# Altium PCB soldering.PcbDoc
Units mm, origin at the board's own origin, x right, y up, seen from the top; angles counter-clockwise.
Board outline 85 x 34.5 mm, 2 copper layers (Top Layer, Bottom Layer), stack 1.571 mm thick; 52 components, 48 nets, 169 pads, 3 vias.
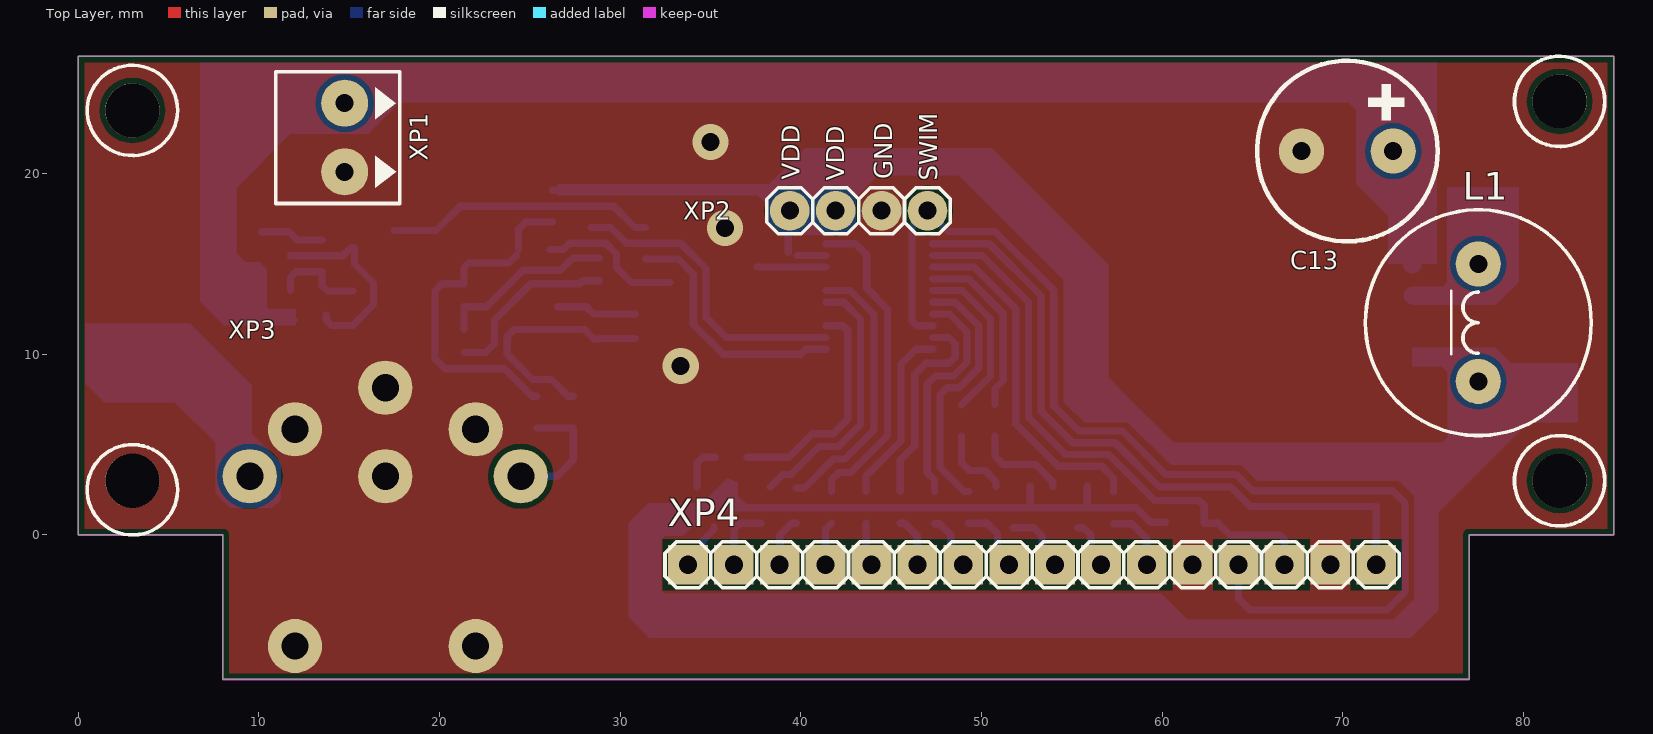
[diagram p0: Top Layer view]
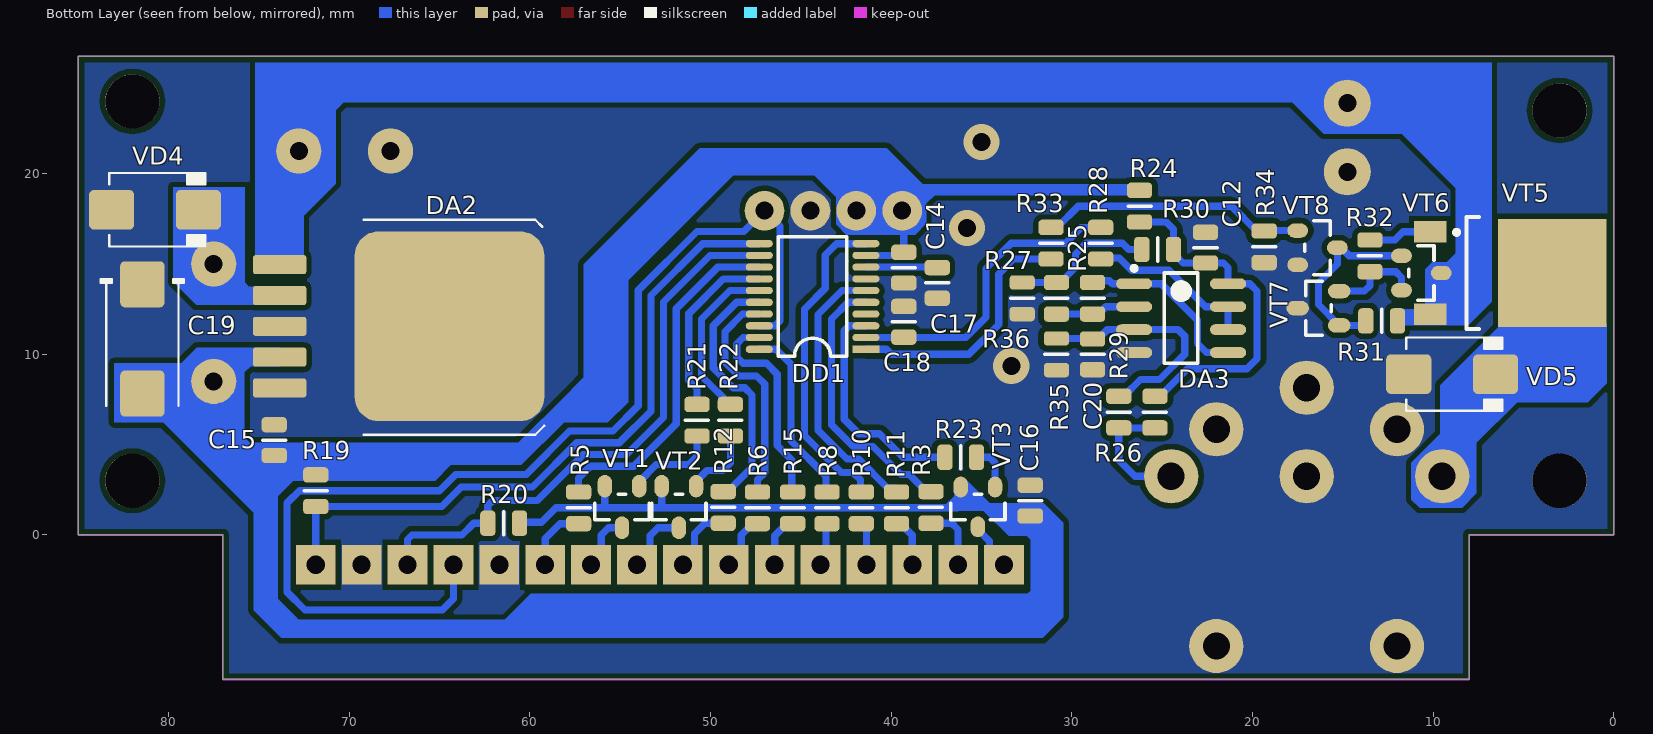
[diagram p1: Bottom Layer view, seen from below]

## Layer stack, top to bottom
Top Solder: solder mask 0.0102, Solder Resist, Dk 3.5
Top Layer: signal copper 0.0356
Dielectric1: core 1.5, FR-4, Dk 4.8
Bottom Layer: signal copper 0.0356
Bottom Solder: solder mask 0.0102, Solder Resist, Dk 3.5

## Board outline
0,0 0,26.5 85,26.5 85,0 77,0 77,-8 8,-8 8,0

## Design rules (kind name [scope] priority, off if disabled: settings)
Clearance Clearance_3 [IsRegion] p1: gap=0.3 ignorepadtopadclearanceinfootprint=FALSE except(0: Arc-Hole Track-Hole SMDPad-Hole THPad-Hole Via-Hole Fill-Hole Poly-Hole Region-Hole Text-Hole)
Clearance [All] p2: gap=0.2 ignorepadtopadclearanceinfootprint=FALSE except(0: Arc-Hole Track-Hole SMDPad-Hole THPad-Hole Via-Hole Fill-Hole Poly-Hole Region-Hole Text-Hole; 0.25: Arc-Arc Arc-Track Track-Track)
Clearance Clearance_2 [IsPad vs IsPad] p3: gap=0.2 ignorepadtopadclearanceinfootprint=FALSE except(0: Arc-Hole Track-Hole SMDPad-Hole THPad-Hole Via-Hole Fill-Hole Poly-Hole Region-Hole Text-Hole)
Clearance Clearance_1 [IsTrack vs IsTrack] p4: gap=0.2 ignorepadtopadclearanceinfootprint=FALSE except(0: Arc-Hole Track-Hole SMDPad-Hole THPad-Hole Via-Hole Fill-Hole Poly-Hole Region-Hole Text-Hole)
ComponentClearance [All] p1: gap=0.2 collisioncheckmode=3 verticalgap=0.2 showdistances=FALSE
HoleSize [All] p1: absolutevalues=TRUE maxlimit=40 minlimit=0.025 maxpercent=80.000 minpercent=20.000
MinimumSolderMaskSliver [All] p1: minsoldermaskwidth=0.15
PolygonConnect [All] p1: connectstyle=Direct reliefconductorwidth=0.254 reliefentries=4 polygonreliefangle="90 Angle" airgapwidth=0.254
RoutingVias [All] p1: holewidth=0.5 width=1.5 viastyle="Through Hole" minholewidth=0.2 minwidth=1 maxholewidth=2 maxwidth=3
SilkToSilkClearance [All] p1: silktosilkclearance=0.15
SilkToSolderMaskClearance SilkscreenOverComponentPads [IsPad] p1: minsilkscreentomaskgap=0.15 clearancetoexposedcopper=TRUE
SolderMaskExpansion [All] p1: expansion=0.102
Width [All] p1: maxlimit=3 minlimit=0.2 preferedwidth=1
25 further rules are at their usual default settings.

## Components (designator, comment, footprint, x,y, rotation, side; value= is the part's Value field where it differs from the comment)
C12 "10uF" CAP0805R 22.6,15.9 r90 bottom
C13 "470uF" CAP_EL_10_19_VERT 70.25,21.25 r0 top
C14 "10uF" CAP0805R 39.3,14.8 r90 bottom
C15 "10uF" CAP0805R 74.15,5.25 r270 bottom
C16 "10uF" CAP0805R 32.3,1.9 r270 bottom
C17 "10uF" CAP0805R 37.45,13.95 r90 bottom
C18 "100nF" CAP0805R 39.3,11.8 r270 bottom
C19 "330uF" TAN_D 81.45,10.85 r270 bottom
C20 "100nF" CAP0805R 28.85,10 r90 bottom
DA2 "LM2575S-5.0" TO-263-5 67.7,11.55 r180 bottom
DA3 "OP Amp" SOP8 23.95,12 r180 bottom
DD1 "8 Bit MCU" TSSOP20 44.35,13.2 r0 bottom
L1 "220 uH" SL1016 77.5,11.75 r270 top
R3 "22" RES0805R#1 37.8,1.525 r270 bottom
R5 "22" RES0805R#1 57.3,1.5 r90 bottom
R6 "22" RES0805R#1 47.4,1.5 r270 bottom
R8 "22" RES0805R#1 43.55,1.5 r90 bottom
R10 "22" RES0805R#1 41.65,1.5 r90 bottom
R11 "22" RES0805R#1 39.7,1.5 r270 bottom
R12 "22" RES0805R#1 49.3,1.525 r90 bottom
R15 "22" RES0805R#1 45.45,1.5 r270 bottom
R19 "10k" RES0805R#1 71.85,2.45 r90 bottom
R20 "10k" RES0805R#1 61.45,0.65 r180 bottom
R21 "22" RES0805R#1 50.75,6.35 r270 bottom
R22 "22" RES0805R#1 48.9,6.35 r270 bottom
R23 "22" RES0805R#1 36.15,4.3 r180 bottom
R24 "10" RES0805R#1 26.25,18.2 r270 bottom
R25 "33k" RES0805R#1 28.85,13.1 r90 bottom
R26 "1k" RES0805R#1 25.4,6.8 r90 bottom
R27 "10k" RES0805R#1 30.85,13.1 r270 bottom
R28 "6k8" RES0805R#1 28.4,16.15 r90 bottom
R29 "10k" RES0805R#1 27.4,6.8 r90 bottom
R30 "1k" RES0805R#1 25.25,15.8 r0 bottom
R31 "10k" RES0805R#1 12.85,11.85 r180 bottom
R32 "100" RES0805R#1 13.5,15.45 r90 bottom
R33 "51" RES0805R#1 31.15,16.15 r270 bottom
R34 "100k" RES0805R#1 19.35,15.95 r90 bottom
R35 "100k" RES0805R#2 30.85,10 r90 bottom
R36 "51" RES0805R#2 32.75,13.1 r90 bottom
VD4 "10BQ100" DO-214AA 80.75,18 r180 bottom
VD5 "10BQ100" DO-214AA 8.95,8.9 r180 bottom
VT1 "IRLML6402" SOT23#1 54.9,1.55 r0 bottom
VT2 "IRLML6402" SOT23#1 51.75,1.55 r0 bottom
VT3 "IRLML6402" SOT23#2 35.2,1.55 r270 bottom
VT5 "STD10PF06T4" DPAK 5.95,14.5 r180 bottom
VT6 "BC847C" SOT23#2 10.65,14.5 r180 bottom
VT7 "BC857B" SOT23#1 16.35,12.55 r90 bottom
VT8 "BC847C" SOT23#2 16.4,15.9 r180 bottom
XP1 "340-021-12" 340-021-12 14.75,22 r90 top
XP2 "PLS" PLS-04 43.2,17.95 r180 top
XP3 "KDJ01-6" KDJ01-6 17,-9.15 r180 top
XP4 "PLS" PLS-16 33.75,-1.65 r0 top

## Footprints (in the part's own frame and the unit in brackets; to place one, negate y for a bottom-side part, rotate by r counter-clockwise, add the part's x,y. Pads: shape width x height; smd on the part's side, far side on the other; paste and mask are expansions set on the pad)
340-021-12 [mm]
  round 2.6 hole 1: 1(1.905,0) 2(-1.905,0)
  silkscreen extent -3.65,-3.05 3.65,3.81, body extent -3.55,-3.1 3.55,3.9, height 8.51
CAP0805R [mm] "capacitor 0805 reflow soldering"
  rrect50% 0.85x1.4 smd: 1(-0.85,0) 2(0.85,0)
  silkscreen extent 0,-0.63 0,0.64, body extent -1,-0.62 1,0.63, height 0.61
CAP_EL_10_19_VERT [mm]
  round 2.5 hole 1: 1(-2.54,0) 2(2.54,0)
  silkscreen extent -5,-5 5,5, body extent -5.08,-5.07 5.08,5.07, height 20.33
DO-214AA [mm] "JEDEC DO214 variation AA. SMB"
  round 0.508 on Mech15: 0(0,0)
  rrect25% 2.5x2.2 smd: A(-2.4,0) K(2.4,0)
  silkscreen extent -2.54,-2.03 2.79,2.03, body extent -2.8,-1.97 2.8,1.98, height 2.62
DPAK [mm] "D-PAK, 4-Leads, Body 6.1x6mm, Pitch 2.28mm, Lead Span 9.7mm, IPC High Density"
  rect 1.8x1.2 smd: 1(-4.2,2.28) 2(-4.2,-2.28)
  rect 6x6 smd: 3(2.54,0)
  silkscreen extent -2.88,-3.1 -1.5,3.1, body extent -4.55,-3.28 5.15,3.3, height 2.32
KDJ01-6 [mm]
  round 3 hole 1.5: 1(-7.5,-12.4) 2(-5,-15) 3(0,-17.3) 4(5,-15) 5(7.5,-12.4) 6(0,-12.4) 7(-5,-3) 8(5,-3)
  body extent -10.5,-19.5 10.5,0, height 19.51
PLS-04 [mm]
  round 2.2 hole 1: 1(-3.81,0) 2(-1.27,0) 3(1.27,0) 4(3.81,0)
  silkscreen extent -5.08,-1.27 5.08,1.27, body extent -5.08,-1.27 5.08,1.27, height 8.45
PLS-16 [mm]
  rect 2.2x2.2 hole 1: 1(0,0) 2(2.54,0) 3(5.08,0) 4(7.62,0) 5(10.16,0) 6(12.7,0) 7(15.24,0) 8(17.78,0) 9(20.32,0) 10(22.86,0) 11(25.4,0) 12(27.94,0) 13(30.48,0) 14(33.02,0) 15(35.56,0) 16(38.1,0)
  silkscreen extent -1.27,-1.27 39.37,1.27, body extent -1.27,-1.27 39.37,1.27, height 8.45
RES0805R#1 [mm] "resistor 0805 reflow soldering"
  rrect50% 0.85x1.4 smd: 1(-0.875,0) 2(0.875,0)
  silkscreen extent 0,-0.64 0,0.64, body extent -1,-0.62 1,0.63, height 0.61
RES0805R#2 [mm] "resistor 0805 reflow soldering"
  rrect50% 0.8x1.4 smd: 1(-0.875,0) 2(0.875,0)
  silkscreen extent 0,-0.64 0,0.64, body extent -1,-0.62 1,0.63, height 0.61
SL1016 [mm]
  round 2.5 hole 1: 1(-3.25,0) 2(3.25,0)
  silkscreen extent -6.25,-6.25 6.25,6.25, body extent -6.5,-6.5 6.5,6.5, height 20
SOP8 [mm] "SOP, 8-Leads"
  oval 2x0.6 smd mask+0.1: 1(-2.6,1.905) 2(-2.6,0.635) 3(-2.6,-0.635) 4(-2.6,-1.905) 5(2.6,-1.905) 6(2.6,-0.635) 7(2.6,0.635) 8(2.6,1.905)
  silkscreen extent -2.73,-2.5 0.92,2.88, body extent -2.9,-2.4 2.9,2.4, height 1.77
SOT23#1 [mm]
  oval 0.8x1.25 smd mask+0.1: 1(-0.95,-1.15) 2(0.95,-1.15) 3(0,1.15)
  silkscreen extent -1.5,-0.7 1.5,0.7, body extent -1.46,-1.16 1.46,1.18, height 1
SOT23#2 [mm]
  oval 1.15x0.8 smd mask+0.1: 1(-1.1,0.95) 2(-1.1,-0.95) 3(1.1,0)
  silkscreen extent -0.7,-1.5 0.7,1.5, body extent -1.16,-1.46 1.18,1.46, height 1
TAN_D [mm] "Molded body capacitor, Body 7.3x4.3mm, 2917, IPC Nominal settings"
  round 1 on Mech15: 0(0,0)
  rrect20% 2.55x2.45 smd: 1(-3.025,0) 2(3.025,0)
  silkscreen extent -3.3,-2.3 3.7,2.3, body extent -3.8,-1.97 3.8,1.98, height 3.1
TO-263-5 [mm] "D-PAK/TO-263-5; 5 Leads; Body 14.4 (inc. leads) x 10.4 mm (LxW max)"
  round 0.5 on Mech15: 0(0,0)
  rrect25% 2.95x1.05 smd: 1(-6.15,3.41) 2(-6.15,1.705) 3(-6.15,0) 4(-6.15,-1.705) 5(-6.15,-3.41)
  rrect25% 10.5x10.5 smd: 6(3.25,0)
  silkscreen extent -1.5,-6 8.5,5.9, body extent -6.73,-5.08 7.29,5.08, height 4.56
TSSOP20 [mm] "TSOP, 20-Leads, Body 6,6x4,5mm (max), Pitch 0,65mm, IPC Medium Density"
  rect 1.5x0.4 smd mask+0.05: 1(-2.95,2.925)
  oval 1.5x0.4 smd mask+0.05: 2(-2.95,2.275) 3(-2.95,1.625) 4(-2.95,0.975) 5(-2.95,0.325) 6(-2.95,-0.325) 7(-2.95,-0.975) 8(-2.95,-1.625) 9(-2.95,-2.275) 10(-2.95,-2.925) 11(2.95,-2.925) 12(2.95,-2.275) 13(2.95,-1.625) 14(2.95,-0.975) 15(2.95,-0.325) 16(2.95,0.325) 17(2.95,0.975) 18(2.95,1.625) 19(2.95,2.275) 20(2.95,2.925)
  silkscreen extent -1.9,-3.3 1.9,3.3, body extent -3.27,-3.3 3.28,3.3, height 1.11

## Part data
C12 C14 C15 C16 C17: library part CC0805_10UF_10V_10%_X7R, "SMD 0805 Capacitor", Case=0805, Manufacturer=GENERIC, Manufacturer1 ComponentHeight=1.35mm, Manufacturer1 Example=MURATA, Manufacturer1 Part Number=GRM21BR71A106KE51L, Tolerance=±10%, Voltage=10V, Author="I. Kuznetsov", Component Type=Standard, CreateDate=30.04.2012, HelpURL=\\cern.ch\dfs\Applications\Altium\Datasheets\CC0805_X7R_MURATA.pdf, LatestRevisionDate=30.04.2012, Manufacturer Part Number=CC0805_10UF_10V_10%_X7R, Mounted=Yes, Part Description="SMD Multilayer Chip Ceramic Capacitor", Part Number=CC0805_10UF_10V_10%_X7R, Pin Count=2, SMD=Yes, Socket=No, Status=Preferred, Table="Capacitors SMD", TC=X7R
C13: library part "SH050M0470B5S-1019 (VERT MOUNTED)", Voltage=50V, Part Number="SH050M0470B5S-1019 (VERT MOUNTED)", Table="Electrolytic THD"
C18 C20: library part CC0805_100NF_50V_10%_X7R, "SMD 0805 Capacitor", Case=0805, Manufacturer=GENERIC, Manufacturer1 ComponentHeight=1.35mm, Manufacturer1 Example=EPCOS, Manufacturer1 Part Number=B37941K5104K62, Tolerance=±10%, Voltage=50V, Author="I. Kuznetsov", Component Type=Standard, CreateDate=03.12.2007, HelpURL=\\cern.ch\dfs\Applications\Altium\Datasheets\CC0805_X7R_EPCOS.pdf, LatestRevisionDate=03.12.2007, Manufacturer Part Number=CC0805_100NF_50V_10%_X7R, Mounted=Yes, Part Description="SMD Multilayer Chip Ceramic Capacitor", Part Number=CC0805_100NF_50V_10%_X7R, Pin Count=2, SMD=Yes, Socket=No, Status=Preferred, Table="Capacitors SMD", TC=X7R
C19: library part T495D337M010AHE100, Voltage=10V, Part Number=T495D337M010AHE100, Table=Tantalum
DA2: Case=TO-263-5, Manufacturer=TI, Author="I. Kuznetsov", Component Type=Standard, Device=LM2575S-5.0, Manufacturer Part Number=LM2575S-5.0, Mounted=Yes, Part Number=LM2575S-5.0, Pin Count=6, SMD=Yes, Socket=No, Status=Active, Table=Regulators
DA3: library part LM358AM, PartNumber=LM358AM
DD1: library part STM8S003F3P6, "8 Bit MCU (STmicroelectronics)", PartNumber=STM8S003F3P6
L1: library part SL1016T-4R7K-B-N, Tolerance="± 10%", Part Number=SL1016T-4R7K-B-N, Table="Inductors THD"
R3 R5 R6 R8 R10 R11 R12 R15 R21 R22 R23: library part R0805_22R_1%_0.125W_100PPM, Case=0805, Manufacturer=GENERIC, Manufacturer1 ComponentHeight=0.6mm, Manufacturer1 Example="NIC COMPONENT", Manufacturer1 Part Number=NRC10F22R0TRF, Power=0.125W, Tolerance=±1%, Author="CERN DEM JLC", Component Type=Standard, CreateDate=03.12.2007, HelpURL=\\cern.ch\dfs\Applications\Altium\Datasheets\R0805_NIC_NRC.pdf, LatestRevisionDate=13.03.2008, Manufacturer Part Number=R0805_22R_1%_0.125W_100PPM, Mounted=Yes, Part Description="General Purpose Thick Film Chip Resistor", Part Number=R0805_22R_1%_0.125W_100PPM, Pin Count=2, SMD=Yes, Socket=No, Status=Preferred, Table="Resistors SMD", TC=±100ppm/°C
R19 R20 R27 R29 R31: library part R0805_10K_1%_0.125W_100PPM, Case=0805, Manufacturer=GENERIC, Manufacturer1 ComponentHeight=0.6mm, Manufacturer1 Example="NIC COMPONENT", Manufacturer1 Part Number=NRC10F1002TRF, Power=0.125W, Tolerance=±1%, Author="CERN DEM JLC", Component Type=Standard, HelpURL=\\cern.ch\dfs\Applications\Altium\Datasheets\R0805_NIC_NRC.pdf, Manufacturer Part Number=R0805_10K_1%_0.125W_100PPM, Mounted=Yes, Part Description="General Purpose Thick Film Chip Resistor", Part Number=R0805_10K_1%_0.125W_100PPM, Pin Count=2, SMD=Yes, Socket=No, Status=Preferred, Table="Resistors SMD", TC=±100ppm/°C
  R19 R20 R31: CreateDate=03.12.2007, LatestRevisionDate=13.03.2008
  R27 R29: CreateDate=12/3/2007, LatestRevisionDate=3/13/2008, PackageDescription=Standard
R24: library part R0805_10R_1%_0.125W_200PPM, Case=0805, Manufacturer=GENERIC, Manufacturer1 ComponentHeight=0.6mm, Manufacturer1 Example="NIC COMPONENT", Manufacturer1 Part Number=NRC10F10R0TRF, Power=0.125W, Tolerance=±1%, Author="CERN DEM JLC", Component Type=Standard, CreateDate=03.12.2007, HelpURL=\\cern.ch\dfs\Applications\Altium\Datasheets\R0805_NIC_NRC.pdf, LatestRevisionDate=24.06.2009, Manufacturer Part Number=R0805_10R_1%_0.125W_200PPM, Mounted=Yes, Part Description="General Purpose Thick Film Chip Resistor", Part Number=R0805_10R_1%_0.125W_200PPM, Pin Count=2, SMD=Yes, Socket=No, Status=Preferred, Table="Resistors SMD", TC=±200ppm/°C
R25: library part R0805_33K_1%_0.125W_100PPM, Case=0805, Manufacturer=GENERIC, Manufacturer1 ComponentHeight=0.6mm, Manufacturer1 Example="NIC COMPONENT", Manufacturer1 Part Number=NRC10F3302TRF, Power=0.125W, Tolerance=±1%, Author="CERN DEM JLC", Component Type=Standard, CreateDate=12/3/2007, HelpURL=\\cern.ch\dfs\Applications\Altium\Datasheets\R0805_NIC_NRC.pdf, LatestRevisionDate=3/13/2008, Manufacturer Part Number=R0805_33K_1%_0.125W_100PPM, Mounted=Yes, PackageDescription=Standard, Part Description="General Purpose Thick Film Chip Resistor", Part Number=R0805_33K_1%_0.125W_100PPM, Pin Count=2, SMD=Yes, Socket=No, Status=Preferred, Table="Resistors SMD", TC=±100ppm/°C
R26 R30: library part R0805_1K_1%_0.125W_100PPM, Case=0805, Manufacturer=GENERIC, Manufacturer1 ComponentHeight=0.6mm, Manufacturer1 Example="NIC COMPONENT", Manufacturer1 Part Number=NRC10F1001TRF, Power=0.125W, Tolerance=±1%, Author="CERN DEM JLC", Component Type=Standard, HelpURL=\\cern.ch\dfs\Applications\Altium\Datasheets\R0805_NIC_NRC.pdf, Manufacturer Part Number=R0805_1K_1%_0.125W_100PPM, Mounted=Yes, Part Description="General Purpose Thick Film Chip Resistor", Part Number=R0805_1K_1%_0.125W_100PPM, Pin Count=2, SMD=Yes, Socket=No, Status=Preferred, Table="Resistors SMD", TC=±100ppm/°C
  R26: CreateDate=12/3/2007, LatestRevisionDate=3/13/2008, PackageDescription=Standard
  R30: CreateDate=03.12.2007, LatestRevisionDate=13.03.2008
R28: library part R0805_6K8_1%_0.125W_100PPM, Case=0805, Manufacturer=GENERIC, Manufacturer1 ComponentHeight=0.6mm, Manufacturer1 Example="NIC COMPONENT", Manufacturer1 Part Number=NRC10F6801TRF, Power=0.125W, Tolerance=±1%, Author="CERN DEM JLC", Component Type=Standard, CreateDate=03.12.2007, HelpURL=\\cern.ch\dfs\Applications\Altium\Datasheets\R0805_NIC_NRC.pdf, LatestRevisionDate=13.03.2008, Manufacturer Part Number=R0805_6K8_1%_0.125W_100PPM, Mounted=Yes, Part Description="General Purpose Thick Film Chip Resistor", Part Number=R0805_6K8_1%_0.125W_100PPM, Pin Count=2, SMD=Yes, Socket=No, Status=Preferred, Table="Resistors SMD", TC=±100ppm/°C
R32: library part R0805_100R_1%_0.125W_100PPM, Case=0805, Manufacturer=GENERIC, Manufacturer1 ComponentHeight=0.6mm, Manufacturer1 Example="NIC COMPONENT", Manufacturer1 Part Number=NRC10F4700TRF, Power=0.125W, Tolerance=±1%, Author="CERN DEM JLC", Component Type=Standard, CreateDate=03.12.2007, HelpURL=\\cern.ch\dfs\Applications\Altium\Datasheets\R0805_NIC_NRC.pdf, LatestRevisionDate=13.03.2008, Manufacturer Part Number=R0805_100R_1%_0.125W_100PPM, Mounted=Yes, Part Description="General Purpose Thick Film Chip Resistor", Part Number=R0805_100R_1%_0.125W_100PPM, Pin Count=2, SMD=Yes, Socket=No, Status=Preferred, Table="Resistors SMD", TC=±100ppm/°C
R33 R36: library part R0805_51R_1%_0.125W_100PPM, Case=0805, Manufacturer=GENERIC, Manufacturer1 ComponentHeight=0.6mm, Manufacturer1 Example="NIC COMPONENT", Manufacturer1 Part Number=NRC10F51R0TRF, Power=0.125W, Tolerance=±1%, Author="CERN DEM JLC", Component Type=Standard, HelpURL=\\cern.ch\dfs\Applications\Altium\Datasheets\R0805_NIC_NRC.pdf, Manufacturer Part Number=R0805_51R_1%_0.125W_100PPM, Mounted=Yes, Part Description="General Purpose Thick Film Chip Resistor", Part Number=R0805_51R_1%_0.125W_100PPM, Pin Count=2, SMD=Yes, Socket=No, Status=Preferred, Table="Resistors SMD", TC=±100ppm/°C
  R33: CreateDate=03.12.2007, LatestRevisionDate=13.03.2008
  R36: CreateDate=12/3/2007, LatestRevisionDate=3/13/2008, PackageDescription=Standard
R34 R35: library part R0805_100K_1%_0.125W_100PPM, Case=0805, Manufacturer=GENERIC, Manufacturer1 ComponentHeight=0.6mm, Manufacturer1 Example="NIC COMPONENT", Manufacturer1 Part Number=NRC10F1003TRF, Power=0.125W, Tolerance=±1%, Author="CERN DEM JLC", Component Type=Standard, HelpURL=\\cern.ch\dfs\Applications\Altium\Datasheets\R0805_NIC_NRC.pdf, Manufacturer Part Number=R0805_100K_1%_0.125W_100PPM, Mounted=Yes, Part Description="General Purpose Thick Film Chip Resistor", Part Number=R0805_100K_1%_0.125W_100PPM, Pin Count=2, SMD=Yes, Socket=No, Status=Preferred, Table="Resistors SMD", TC=±100ppm/°C
  R34: CreateDate=03.12.2007, LatestRevisionDate=13.03.2008
  R35: CreateDate=12/3/2007, LatestRevisionDate=3/13/2008, PackageDescription=Standard
VD4 VD5: Case=SMB, Manufacturer=IR, Author="I. Kuznetsov", Component Type=Standard, Device=10BQ100, Manufacturer Part Number=10BQ100, Mounted=Yes, Part Number=10BQ100, Pin Count=2, SMD=Yes, Socket=No, Status=Active, Table=Diode
VT1 VT2 VT3 VT6 VT7 VT8: Case=SOT23, Author="I. Kuznetsov", Component Type=Standard, Mounted=Yes, SMD=Yes, Socket=No, Status=Active, Table=Transistors
  VT1 VT2 VT3: Device=IRLML6402, Part Description="MOSFET P-êàíàë 20Â/3.7À/1.3Âò/0.065 Îì", Part Number=IRLML6402
  VT6 VT8: Device=BC847C, Part Description="NPN 45Â/0.1À Êóñ.=420-800", Part Number=BC847C
  VT7: Device=BC857B, Part Description="PNP 45Â/0.1À Êóñ.=200-450", Part Number=BC857B
VT5: Case=DPAK, Author="I. Kuznetsov", Device=STD10PF06T4, Part Description="MOSFET P-êàíàë 60Â/10À/40Âò/0.032 Îì", Part Number=STD10PF06T4, Table=Transistors
XP2: library part PLS-04, Manufacturer=AUK, ComponentLink1URL=http://lib.chipdip.ru/227/DOC000227157.pdf, Component Type=Standard, Device=PLS-04, Family=PLS, Manufacturer Part Number=PLS-04, PackageDescription=PLS-04, Part Number=PLS-04, Pin Count=4, SMD=No, Table=AUK
XP4: library part PLS-16, Manufacturer=AUK, ComponentLink1URL=http://lib.chipdip.ru/227/DOC000227157.pdf, Component Type=Standard, Device=PLS-16, Family=PLS, Manufacturer Part Number=PLS-16, PackageDescription=PLS-16, Part Number=PLS-16, Pin Count=16, SMD=No, Table=AUK
XP1: Device=340-021-12, Family=DG340, Part Number=340-021-12, Table=DEGSON
XP3: Device=KDJ01-6, Family=KDJ01-6, Part Number=KDJ01-6, Table=OTHER

## Free pads (board coordinates)
  round 3 hole 3 unplated: 1(3,3) 1(3,23.5) 1(82,3) 1(82,24)

## Via types
v1: diameter 2, hole 1, Top Layer to Bottom Layer, tented both sides, 3 vias

## Nets (pads, with @x,y where several pads share a name; then routed paths per layer and width w, separated by ;. In a path a pad name is that pad's centre, name@x,y a point inside that pad or via, vN(x,y) a via of type N, cw(c..) or ccw(c..) an arc to the next point about the centre after c; other vN are vias at no path point)
+24V: C13.2 DA2.1 R31.2 VT5.2 VT6.3 XP1.1 | length 14.5
  Bottom Layer w0.4: VT5.2 11.655,12.22 R31.2@11.975,11.9
  Bottom Layer w0.5: VT6.3 10.15,13.9 VT5.2
  Bottom Layer w1: 7.4,13.15 8.33,12.22 VT5.2 ; C13.2@73.84,21.8 73.84,14.97 DA2.1
ENC_A: DD1.12 R20.1 XP4.14 | length 31.9
  Bottom Layer w0.4: DD1.12 50.025,15.475 52.6,12.9 52.6,6.5 54.65,4.45 57.05,4.45 59.6,1.9 62.05,1.9 62.325,1.625 R20.1 63.1,0.65 63.75,0 66.52,0 66.77,-0.25 XP4.14 XP4.14@66.77,-1.85
ENC_B: DD1.11 R19.1 XP4.16 | length 37.6
  Bottom Layer w0.4: DD1.11 50.425,16.125 53.3,13.25 53.3,6.85 55.05,5.1 57.4,5.1 59.85,2.65 63.8,2.65 64.875,1.575 R19.1 XP4.16
F_CTL: R32.2 VT5.1 | length 3.5
  Bottom Layer w0.4: VT5.1 11.67,16.78 12.125,16.325 R32.2
GND: C12.2 C13.1 C14.1 C15.1 C16.1 C17.1 C18.1 C19.1 C20.1 DA2.3 DA2.5 DA2.6 DA3.4 DD1.7 pad.1@3,3 R34.1 R35.1 R36.1 VD4.A VD5.A VT7.3 VT8.2 XP1.2 XP2.2 XP3.2 XP3.3 XP3.4 XP3.6 XP3.7 XP3.8 XP4.12 XP4.15
  other v1: 33.35,9.35 35.8,17 35,21.75
IRON_PTC: R26.1 R29.1 XP3.1 | length 7
  Bottom Layer w0.4: XP3.1 26.5,3.25 27.4,4.15 R29.1 R26.1
IRON_PWM: DD1.1 R33.2 | length 13.9
  Bottom Layer w0.4: R33.2@31.4,15.275 33.225,15.275 34.05,14.45 34.05,11.65 35.7,10 40,10 40.275,10.275 DD1.1
IRON_PWR: VD5.K VT5.3 XP3.5
NetC12_1: C12.1 DA3.8 R24.2 R26.2 R30.1 | length 19.3
  Bottom Layer w0.4: R30.1@24.25,15.45 23.85,15.05 C12.1 21.6,15.05 21.35,14.8 DA3.8 20.155,13.905 19.75,13.5 19.75,9.75 20.3,9.2 23.6,9.2 25.125,7.675 R26.2 ; R30.1 24.375,16.925 24.775,17.325 R24.2
NetC20_2: C20.2 DA3.3 R29.2 R35.2 | length 13.1
  Bottom Layer w0.4: R29.2 27.125,7.675 26.2,8.6 25.15,8.6 23.75,10 23.75,11 24.115,11.365 DA3.3 28.035,11.365 28.55,10.85 C20.2 28.875,10.875 R35.2
NetDA2_2: DA2.2 L1.1 VD4.K | length 4.3
  Bottom Layer w1: DA2.2 75.805,13.255 L1.1@77.45,14.9
NetDA3_1: DA3.1 DA3.5 R25.2 | length 9.9
  Bottom Layer w0.4: DA3.5 22.55,10.095 23.05,10.595 23.05,11.9 25.055,13.905 DA3.1 27.755,13.905 27.925,14.075 R25.2@28.85,14.075
NetDA3_2: DA3.2 R25.1 R27.2 | length 4.5
  Bottom Layer w0.4: DA3.2 28.115,12.635 28.525,12.225 R25.1 R27.2
NetDA3_6: DA3.6 DA3.7 R28.1 | length 9.9
  Bottom Layer w0.4: DA3.6 DA3.7 22.6,12.635 24.615,14.65 26.7,14.65 27.375,15.325 R28.1@28.85,15.325
NetR3_2: R3.2 XP4.2 | length 3.8
  Bottom Layer w0.4: XP4.2@36.29,-1.85 36.3,-1.84 36.3,0.3 36.65,0.65 R3.2
NetR5_1: R5.1 XP4.11 | length 3.8
  Bottom Layer w0.4: R5.1 58.325,0.625 59.15,-0.2 XP4.11@59.15,-1.85
NetR6_2: R6.2 XP4.7 | length 3.3
  Bottom Layer w0.4: R6.2 47.675,0.625 48.3,0 48.3,-1.16 XP4.7@48.99,-1.85
NetR8_1: R8.1 XP4.5 | length 2.6
  Bottom Layer w0.4: R8.1@43.6,0.65 43.6,-1.54 XP4.5@43.91,-1.85
NetR10_1: R10.1 XP4.4 | length 2.6
  Bottom Layer w0.4: XP4.4@41.37,-1.85 41.37,0.32 R10.1@41.7,0.65
NetR11_2: R11.2 XP4.3 | length 3
  Bottom Layer w0.4: XP4.3@38.83,-1.85 38.83,-0.02 39.5,0.65 R11.2@39.75,0.65
NetR12_1: R12.1 XP4.8 | length 4
  Bottom Layer w0.4: R12.1 50.3,0.65 50.88,0.07 50.88,-1.2 XP4.8@51.53,-1.85
NetR15_2: R15.2 XP4.6 | length 3
  Bottom Layer w0.4: R15.2@45.5,0.65 45.75,0.65 46.45,-0.05 XP4.6@46.45,-1.85
NetR21_2: R21.2 VT1.1 | length 5.2
  Bottom Layer w0.4: R21.2 50.75,4.35 51.2,3.9 53,3.9 53.95,2.95 VT1.1
NetR22_2: R22.2 VT2.1 | length 4.1
  Bottom Layer w0.4: R22.2 48.9,4 49.325,3.575 50.175,3.575 50.8,2.95 VT2.1
NetR23_2: R23.2 VT3.1 | length 2.5
  Bottom Layer w0.4: VT3.1 34.25,4 34.55,4.3 R23.2
NetR27_1: R27.1 R30.2 R36.2 | length 8.1
  Bottom Layer w0.4: R30.2 26.85,15.8 27.2,16.15 29.2,16.15 29.8,15.55 29.8,14.8 30.625,13.975 R27.1 R36.2
NetR31_1: R31.1 VT6.1 VT7.1 VT8.3 | length 10.8
  Bottom Layer w0.4: VT6.1 14.65,15.45 15.1,15.9 VT8.3 15.3,15 16.35,13.95 16.35,12.75 VT7.1 14.025,11.6 13.725,11.9 R31.1@13.725,12.175
NetR32_1: R32.1 VT6.2 VT7.2 | length 5.2
  Bottom Layer w0.4: VT6.2 11.75,14.25 12.075,14.575 R32.1 13.5,13.8 13.8,13.5 VT7.2
NetR33_1: R33.1 R34.2 VT8.1 | length 14.9
  Bottom Layer w0.4: VT8.1 19.8,16.85 21.15,18.2 29.65,18.2 30.825,17.025 R33.1 R33.1@31.4,17.025
NRST: DD1.4
PWR_SEG1: VT3.3 XP4.1 | length 2.7
  Bottom Layer w0.4: XP4.1 34.55,-0.85 34.55,-0.35 35.2,0.3 VT3.3
PWR_SEG2: VT2.3 XP4.9 | length 3.9
  Bottom Layer w0.4: VT2.3 52.9,0.4 53.35,-0.05 53.35,-1.13 XP4.9@54.07,-1.85
PWR_SEG3: VT1.3 XP4.10 | length 2.9
  Bottom Layer w0.4: 55.35,0.4 55.65,0.4 56.05,0 56.05,-1.29 XP4.10@56.61,-1.85
SEG1: DD1.3 R23.1 | length 12.7
  Bottom Layer w0.4: R23.1 39.35,4.3 40.65,5.6 41.8,5.6 42.6,6.4 42.6,11.3 42.325,11.575 DD1.3
SEG2: DD1.15 R22.1 | length 9.3
  Bottom Layer w0.4: DD1.15 48.925,13.525 50.5,11.95 50.5,8.8 R22.1@48.9,7.2
SEG3: DD1.14 R21.1 | length 9.9
  Bottom Layer w0.4: DD1.14 49.275,14.175 51.2,12.25 51.2,8.55 50.75,8.1 R21.1
SEG_A: DD1.5 R3.1 | length 14.6
  Bottom Layer w0.4: R3.1@38.3,2.65 39,3.35 39.45,3.35 41,4.9 42.1,4.9 43.3,6.1 43.3,11.95 42.375,12.875 DD1.5
SEG_B: DD1.13 R5.2 | length 19.3
  Bottom Layer w0.4: DD1.13 49.6,14.825 51.9,12.525 51.9,6.15 54.25,3.8 56.65,3.8 57.3,3.15 R5.2
SEG_C: DD1.17 R6.1 | length 12.8
  Bottom Layer w0.4: DD1.17 48.225,12.225 49.2,11.25 49.2,9.55 48.45,8.8 47.45,8.8 47,8.35 47,3.45 47.4,3.05 R6.1@47.4,2.4
SEG_D: DD1.20 R8.2 | length 9.9
  Bottom Layer w0.4: R8.2@43.6,2.4 43.6,3.25 45.55,5.2 45.55,9.45 46.375,10.275 DD1.20
SEG_DP: DD1.19 R15.1 | length 11.6
  Bottom Layer w0.4: R15.1@45.5,2.4 45.5,4.15 46.3,4.95 46.3,8.9 46.9,9.5 48.2,9.5 48.55,9.85 48.55,10.575 48.2,10.925 DD1.19
SEG_E: DD1.10 R10.2 | length 17.8
  Bottom Layer w0.4: DD1.10 43.025,16.125 43.65,15.5 43.65,13.65 44.8,12.5 44.8,5.5 42.75,3.45 42.1,3.45 41.7,3.05 R10.2@41.7,2.4
SEG_F: DD1.6 R11.1 | length 15.2
  Bottom Layer w0.4: R11.1@39.75,2.6 40.2,2.6 41.8,4.2 42.45,4.2 44.05,5.8 44.05,12.2 42.725,13.525 DD1.6
SEG_G: DD1.16 R12.2 | length 14.3
  Bottom Layer w0.4: DD1.16 48.55,12.875 49.85,11.575 49.85,9.25 48.75,8.15 48.1,8.15 47.7,7.75 47.7,3.75 49.05,2.4 R12.2
SWIM: DD1.18 XP2.1 XP4.13 | length 61.1
  Bottom Layer w0.4: DD1.18 46.425,11.575 46.15,11.85 46.15,17.09 XP2.1 48.16,16.8 50.75,16.8 54,13.55 54,7.15 55.4,5.75 57.8,5.75 60.2,3.35 64.1,3.35 65,2.45 72.75,2.45 73.45,1.75 73.45,-3.15 72.45,-4.15 64.85,-4.15 64.23,-3.53 XP4.13@64.23,-1.85
TEMP_IN: C18.2 DD1.2 R28.2 | length 17.1
  Bottom Layer w0.4: R28.2 29.475,17.025 30.35,16.15 33.35,16.15 34.75,14.75 34.75,12.05 35.875,10.925 DD1.2
VCAP: C17.2 DD1.8 | length 3.8
  Bottom Layer w0.4: C17.2@37.575,14.825 DD1.8
VDD: C14.2 C15.2 C16.2 C19.2 DA2.4 DD1.9 L1.2 R19.2 R20.2 R24.1 VT1.2 VT2.2 VT3.2 XP2.3 XP2.4 | length 82.9
  Bottom Layer w0.4: R24.1 38.5,19.075 ; 31.75,-0.3 31.75,0.2 ; 34.1,-5.1 72.4,-5.1 ; VT3.2@36,2.65 VT3.2 36.15,1.95 36.6,1.5 52.65,1.5 ; C14.2 39.3,17.28 XP2.4@39.87,17.85 ; C14.2@39.8,15.475 DD1.9 ; VT2.2 52.7,1.55 52.65,1.5 ; VT1.2 55.85,1.55 55.9,1.5 ; R20.2@60.175,0.7 59.35,0.7 58.55,1.5 55.9,1.5 ; 52.65,1.5 55.9,1.5
pads on no net: C19.0 DA2.0 VD4.0 VD5.0

## Polygon pours and split planes (outlines as drawn)
no net on Bottom Layer "GND" (solid, pour order 4): 0,26.5 6.6,26.5 6.6,17.7 0,17.7
GND on Bottom Layer "GND" (solid, remove dead copper, pour order 0): 0,27 85,27 85,0 77,0 77,-8 8,-8 8,0 0,0
GND on Top Layer "GND" (solid, pour order 2): 0,26.5 0,25.5 0,0 8,0 8,-8 76.9,-8.1 77,-8 77,0 85,0 85,26.5

## Keep-outs
Keep-Out Layer:
  the board outline again, w0.1

## Other copper
Bottom Layer:
  region net NetDA2_2: 73.9,13.75 75.55,13.75 75.775,13.975 75.775,19.25 79.74,19.25 79.74,14.015 78.475,12.75 73.9,12.75
  region net +24V: 12.05,11.6 8.05,11.6 6.75,12.9 6.75,26.15 75.2,26.15 75.2,24.9 75.2,20.75 75.2,15 72.525,15 72.525,17.675 70.75,19.45 70.75,23.5 70.3,23.95 17.8,23.95 16.05,22.2 11.75,22.2 8.75,19.2 8.75,15.6 9.25,15.1 10.05,15.1 10.45,14.7 10.45,12.5 12.05,12.5
  region net IRON_PWR: 0.4,11.7 0.4,8.4 1.45,7.35 5.35,7.35 7.6,5.1 7.6,2.3 8.4,1.5 10.75,1.5 11.2,1.95 11.2,4 9.6,5.6 9.6,8.3 6.2,11.7
  region net VDD: 30.475,0.675 30.475,-4.561 31.614,-5.7 73.75,-5.7 75.275,-4.175 75.275,1.225 76.275,2.225 78.8,4.75 79.47,5.42 75.82,5.42 75.491,5.091 60.65,5.091 57.916,7.825 57.495,8.245 57.012,8.728 57.012,14.988 50.6,21.4 40.25,21.4 38.25,19.4 26.55,19.4 26.55,18.8 37.6,18.8 38.05,18.35 38.05,17.25 38.675,16.625 42.475,16.625 43.05,17.2 43.05,18.7 44.25,19.9 48.75,19.9 54.55,14.1 54.55,7.35 55.7,6.25 58.1,6.25 60.475,3.875 64.375,3.875 65.25,3 73.1,3 73.95,2.15 73.95,-3.525 72.787,-4.687 61.383,-4.687 59.95,-3.254 32.454,-3.254 32.275,-3.075 32.275,-0.275 32.5,-0.05 33.5,-0.05 34.9,1.35 36.25,1.35 36.3,1.3 37.008,1.3 37.008,1.658 36.516,2.15 36.516,2.9 35.919,3.131 34.539,1.75 31.55,1.75
  region net VDD: 73.85,10.35 78.45,10.35 79.3,9.5 83,9.5 83,6.25 80.3,6.25 79.45,5.4 75.8,5.4 75.8,9 75.45,9.35 73.85,9.35

## Silkscreen, mask and mechanical layers (free items; w line width, h text height)
Top Overlay:
  circle w0.2: c82,3 r2.5
  circle w0.2: c82,24 r2.5
  circle w0.2: c3,23.5 r2.5
  circle w0.2: c3,2.5 r2.5
  text "GND" at 45.05,19.7 h1 r90
  text "VDD" at 39.95,19.65 h1 r90
  text "VDD" at 42.4,19.6 h1 r90
  text "SWIM" at 47.55,19.6 h1 r90